# Altium PCB AICat V1.5 双面板 板厚1.6mm.PcbDoc (part 5 of 6)
Units mil, origin at the board's own origin, x right, y up, seen from the top; angles counter-clockwise.
Board outline 2778 x 2104 mil, 2 copper layers (Top Layer, Bottom Layer); 123 components, 84 nets, 332 pads, 256 vias.
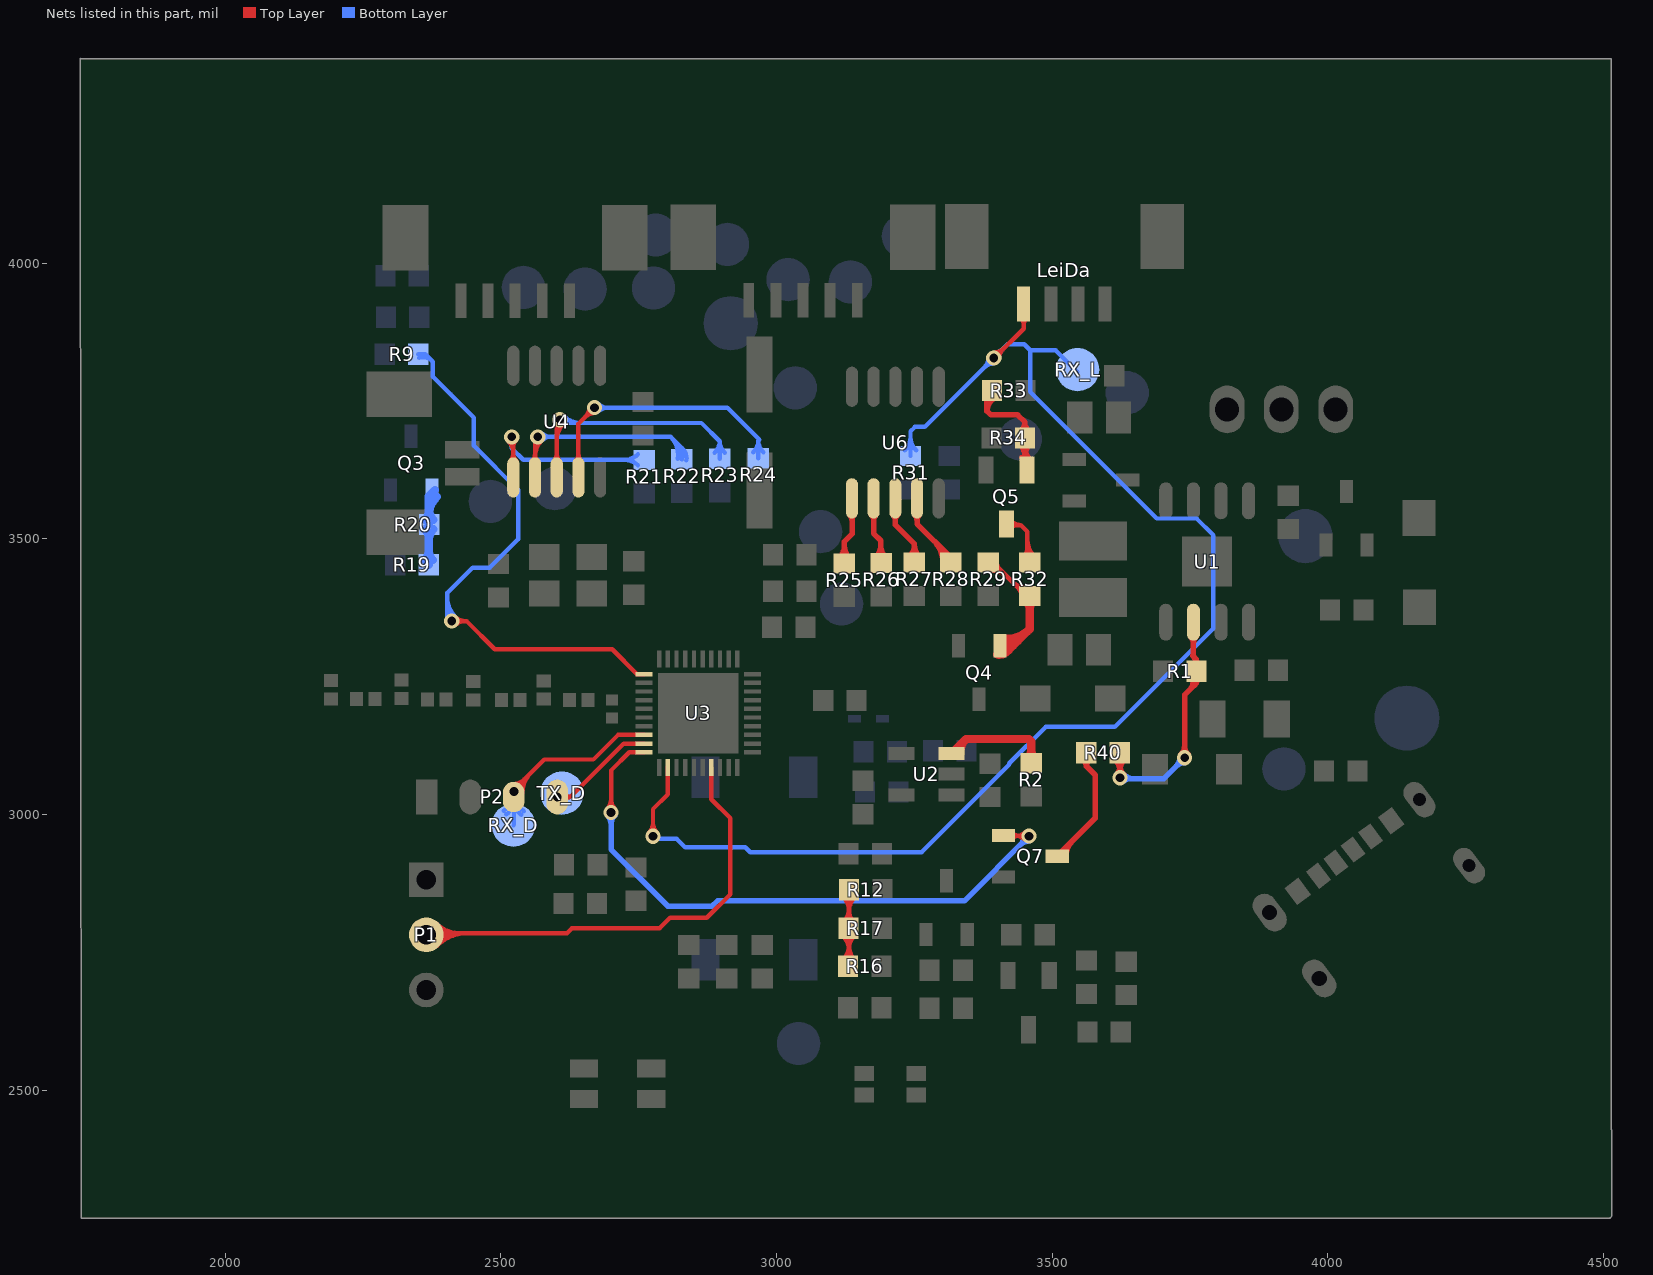
[diagram p5: the nets of this part, all layers, seen from the top]

## Via types
v1: diameter 27.56, hole 15.75, Top Layer to Bottom Layer, tented both sides, 256 vias

## Nets (pads, with @x,y where several pads share a name; then routed paths per layer and width w, separated by ;. In a path a pad name is that pad's centre, name@x,y a point inside that pad or via, vN(x,y) a via of type N, cw(c..) or ccw(c..) an arc to the next point about the centre after c; other vN are vias at no path point) (continued)
NetQ3_1: Q3.1 R19.1 R20.2 | length 935.7
  Bottom Layer w15: R19.1@2369.31,3453 2369.31,3577.09 Q3.1@2380.92,3588.69 ; Q3.1@2377.97,3576.39 ccw(c2398.87,3555.49) 2369.31,3555.49 ; R19.1@2361.67,3461.63 ccw(c2343.22,3480.07) 2369.31,3480.07 ; R19.1@2361.67,3461.63 ccw(c2343.22,3480.07) 2369.31,3480.07 ; R19.1@2361.67,3461.63 ccw(c2343.22,3480.07) 2369.31,3480.07 ; R19.1@2361.67,3461.63 ccw(c2343.22,3480.07) 2369.31,3480.07 ; R19.1@2361.67,3461.63 ccw(c2343.22,3480.07) 2369.31,3480.07 ; R20.2@2362.67,3517.37 cw(c2346.64,3501.34) 2369.31,3501.34 ; R20.2@2362.67,3517.37 cw(c2346.64,3501.34) 2369.31,3501.34 ; R20.2@2362.67,3517.37 cw(c2346.64,3501.34) 2369.31,3501.34 ; R20.2@2362.67,3517.37 cw(c2346.64,3501.34) 2369.31,3501.34 ; R20.2@2362.67,3517.37 cw(c2346.64,3501.34) 2369.31,3501.34 ; R20.2@2362.67,3534.63 ccw(c2346.64,3550.66) 2369.31,3550.66 ; R20.2@2362.67,3534.63 ccw(c2346.64,3550.66) 2369.31,3550.66 ; R20.2@2362.67,3534.63 ccw(c2346.64,3550.66) 2369.31,3550.66 ; R20.2@2362.67,3534.63 ccw(c2346.64,3550.66) 2369.31,3550.66 ; R20.2@2362.67,3534.63 ccw(c2346.64,3550.66) 2369.31,3550.66 ; 2369.31,3480.07 ccw(c2395.4,3480.07) R19.1@2376.96,3461.63 ; 2369.31,3480.07 ccw(c2395.4,3480.07) R19.1@2376.96,3461.63 ; 2369.31,3480.07 ccw(c2395.4,3480.07) R19.1@2376.96,3461.63 ; 2369.31,3480.07 ccw(c2395.4,3480.07) R19.1@2376.96,3461.63 ; 2369.31,3480.07 ccw(c2395.4,3480.07) R19.1@2376.96,3461.63 ; 2369.31,3496.51 cw(c2398.83,3496.51) R20.2@2377.96,3517.37 ; 2369.31,3496.51 cw(c2398.83,3496.51) R20.2@2377.96,3517.37 ; 2369.31,3496.51 cw(c2398.83,3496.51) R20.2@2377.96,3517.37 ; 2369.31,3496.51 cw(c2398.83,3496.51) R20.2@2377.96,3517.37 ; 2369.31,3496.51 cw(c2398.83,3496.51) R20.2@2377.96,3517.37 ; R20.2@2369.31,3541.01 cw(c2419.35,3541.01) Q3.1@2383.97,3576.39 ; R20.2@2369.31,3541.01 cw(c2419.35,3541.01) Q3.1@2383.97,3576.39 ; R20.2@2369.31,3541.01 cw(c2419.35,3541.01) Q3.1@2383.97,3576.39 ; R20.2@2369.31,3541.01 cw(c2419.35,3541.01) Q3.1@2383.97,3576.39 ; 2369.31,3555.49 ccw(c2398.83,3555.49) R20.2@2377.96,3534.63 ; 2369.31,3555.49 ccw(c2398.83,3555.49) R20.2@2377.96,3534.63 ; 2369.31,3555.49 ccw(c2398.83,3555.49) R20.2@2377.96,3534.63 ; 2369.31,3555.49 ccw(c2398.83,3555.49) R20.2@2377.96,3534.63 ; 2369.31,3555.49 ccw(c2398.83,3555.49) R20.2@2377.96,3534.63
NetQ4_1: Q4.1 R29.2 R32.1 | length 1813.3
  Top Layer w8: R29.2@3378,3458.32 3391.37,3458.32 R32.1@3453,3396.69 ; R29.2@3384.98,3443.01 cw(c3384.98,3390.64) 3422.02,3427.67 ; R29.2@3384.98,3443.01 cw(c3384.98,3390.64) 3422.02,3427.67 ; R29.2@3384.98,3443.01 cw(c3384.98,3390.64) 3422.02,3427.67 ; R29.2@3384.98,3443.01 cw(c3384.98,3390.64) 3422.02,3427.67 ; R29.2@3384.98,3443.01 cw(c3384.98,3390.64) 3422.02,3427.67 ; R29.2@3384.98,3451.01 cw(c3384.98,3417.95) 3408.36,3441.33 ; R29.2@3384.98,3451.01 cw(c3384.98,3417.95) 3408.36,3441.33 ; R29.2@3384.98,3451.01 cw(c3384.98,3417.95) 3408.36,3441.33 ; R29.2@3384.98,3451.01 cw(c3384.98,3417.95) 3408.36,3441.33 ; R29.2@3384.98,3451.01 cw(c3384.98,3417.95) 3408.36,3441.33 ; R29.2@3399.29,3457.32 ccw(c3416,3457.32) 3404.19,3445.5 ; R29.2@3399.29,3457.32 ccw(c3416,3457.32) 3404.19,3445.5 ; R29.2@3399.29,3457.32 ccw(c3416,3457.32) 3404.19,3445.5 ; R29.2@3399.29,3457.32 ccw(c3416,3457.32) 3404.19,3445.5 ; R29.2@3399.29,3457.32 ccw(c3416,3457.32) 3404.19,3445.5 ; 3425.03,3424.66 ccw(c3458.02,3457.64) R32.1@3458.02,3410.99 ; 3425.03,3424.66 ccw(c3458.02,3457.64) R32.1@3458.02,3410.99 ; 3425.03,3424.66 ccw(c3458.02,3457.64) R32.1@3458.02,3410.99 ; 3425.03,3424.66 ccw(c3458.02,3457.64) R32.1@3458.02,3410.99 ; 3425.03,3424.66 ccw(c3458.02,3457.64) R32.1@3458.02,3410.99 ; 3437.14,3412.55 cw(c3421.28,3396.69) R32.1@3443.71,3396.69 ; 3437.14,3412.55 cw(c3421.28,3396.69) R32.1@3443.71,3396.69 ; 3437.14,3412.55 cw(c3421.28,3396.69) R32.1@3443.71,3396.69 ; 3437.14,3412.55 cw(c3421.28,3396.69) R32.1@3443.71,3396.69 ; 3437.14,3412.55 cw(c3421.28,3396.69) R32.1@3443.71,3396.69 ; 3438.69,3411 ccw(c3458.02,3430.33) R32.1@3458.02,3402.99 ; 3438.69,3411 ccw(c3458.02,3430.33) R32.1@3458.02,3402.99 ; 3438.69,3411 ccw(c3458.02,3430.33) R32.1@3458.02,3402.99 ; 3438.69,3411 ccw(c3458.02,3430.33) R32.1@3458.02,3402.99 ; 3438.69,3411 ccw(c3458.02,3430.33) R32.1@3458.02,3402.99
  Top Layer w15: Q4.1@3404.92,3296.87 ccw(c3404.92,3332.03) 3429.78,3307.17 ; Q4.1@3404.92,3298.31 3420.92,3298.31 3459,3336.39 ; Q4.1@3404.92,3311.87 ccw(c3404.92,3383.24) 3455.39,3332.77 ; R32.1@3459,3396.69 3459,3336.39 ; Q4.1@3400.27,3290.29 ccw(c3404.01,3310.61) 3418.62,3296 ; Q4.1@3400.27,3290.29 ccw(c3404.01,3310.61) 3418.62,3296 ; Q4.1@3400.27,3290.29 ccw(c3404.01,3310.61) 3418.62,3296 ; Q4.1@3400.27,3290.29 ccw(c3404.01,3310.61) 3418.62,3296 ; Q4.1@3402.99,3305.05 ccw(c3410.29,3344.71) 3438.81,3316.19 ; Q4.1@3402.99,3305.05 ccw(c3410.29,3344.71) 3438.81,3316.19 ; Q4.1@3402.99,3305.05 ccw(c3410.29,3344.71) 3438.81,3316.19 ; Q4.1@3402.99,3305.05 ccw(c3410.29,3344.71) 3438.81,3316.19 ; Q4.1@3405.7,3319.8 ccw(c3416.57,3378.82) 3459,3336.38 ; Q4.1@3405.7,3319.8 ccw(c3416.57,3378.82) 3459,3336.38 ; Q4.1@3405.7,3319.8 ccw(c3416.57,3378.82) 3459,3336.38 ; Q4.1@3405.7,3319.8 ccw(c3416.57,3378.82) 3459,3336.38 ; Q4.1@3407.97,3294.01 cw(c3418.35,3283.62) 3418.35,3298.31 ; Q4.1@3407.97,3294.01 cw(c3418.35,3283.62) 3418.35,3298.31 ; Q4.1@3407.97,3294.01 cw(c3418.35,3283.62) 3418.35,3298.31 ; Q4.1@3407.97,3294.01 cw(c3418.35,3283.62) 3418.35,3298.31 ; R32.1@3451.36,3389.04 cw(c3432.91,3370.6) 3459,3370.6 ; R32.1@3451.36,3389.04 cw(c3432.91,3370.6) 3459,3370.6 ; R32.1@3451.36,3389.04 cw(c3432.91,3370.6) 3459,3370.6 ; R32.1@3451.36,3389.04 cw(c3432.91,3370.6) 3459,3370.6 ; R32.1@3451.36,3389.04 cw(c3432.91,3370.6) 3459,3370.6 ; 3459,3370.6 cw(c3485.09,3370.6) R32.1@3466.64,3389.04 ; 3459,3370.6 cw(c3485.09,3370.6) R32.1@3466.64,3389.04 ; 3459,3370.6 cw(c3485.09,3370.6) R32.1@3466.64,3389.04 ; 3459,3370.6 cw(c3485.09,3370.6) R32.1@3466.64,3389.04 ; 3459,3370.6 cw(c3485.09,3370.6) R32.1@3466.64,3389.04
NetQ5_1: Q5.1 R33.1 R34.2 | length 990.1
  Top Layer w8: R33.1@3376.69,3769 R33.1@3376.69,3777 ; Q5.1@3443.31,3648.3 Q5.1@3452.4,3639.21
  Top Layer w10: R33.1@3381.69,3769 3381.69,3732.31 3389,3725 3437,3725 3450.32,3711.68 ; Q5.1@3450.32,3625.21 3450.32,3711.68 ; 3381.69,3735.89 cw(c3413.81,3735.89) R33.1@3391.1,3758.61 ; 3381.69,3735.89 cw(c3413.81,3735.89) R33.1@3391.1,3758.61 ; 3381.69,3735.89 cw(c3413.81,3735.89) R33.1@3391.1,3758.61 ; R34.2@3440.91,3672.61 cw(c3418.19,3649.89) 3450.32,3649.89 ; R34.2@3440.91,3672.61 cw(c3418.19,3649.89) 3450.32,3649.89 ; R34.2@3440.91,3672.61 cw(c3418.19,3649.89) 3450.32,3649.89 ; R34.2@3440.91,3672.61 cw(c3418.19,3649.89) 3450.32,3649.89 ; R34.2@3440.91,3672.61 cw(c3418.19,3649.89) 3450.32,3649.89 ; R34.2@3442,3694.37 ccw(c3428.14,3711.68) 3450.32,3711.68 ; R34.2@3442,3694.37 ccw(c3428.14,3711.68) 3450.32,3711.68 ; R34.2@3442,3694.37 ccw(c3428.14,3711.68) 3450.32,3711.68 ; R34.2@3442,3694.37 ccw(c3428.14,3711.68) 3450.32,3711.68 ; R34.2@3442,3694.37 ccw(c3428.14,3711.68) 3450.32,3711.68 ; 3450.32,3649.89 cw(c3482.44,3649.89) R34.2@3459.73,3672.61 ; 3450.32,3649.89 cw(c3482.44,3649.89) R34.2@3459.73,3672.61 ; 3450.32,3649.89 cw(c3482.44,3649.89) R34.2@3459.73,3672.61 ; 3450.32,3649.89 cw(c3482.44,3649.89) R34.2@3459.73,3672.61 ; 3450.32,3649.89 cw(c3482.44,3649.89) R34.2@3459.73,3672.61 ; R34.2@3450.32,3667.1 ccw(c3485.46,3667.1) Q5.1@3460.61,3642.25 ; R34.2@3450.32,3667.1 ccw(c3485.46,3667.1) Q5.1@3460.61,3642.25 ; R34.2@3450.32,3667.1 ccw(c3485.46,3667.1) Q5.1@3460.61,3642.25 ; R34.2@3450.32,3667.1 ccw(c3485.46,3667.1) Q5.1@3460.61,3642.25 ; R34.2@3450.32,3667.1 ccw(c3485.46,3667.1) Q5.1@3460.61,3642.25 ; 3450.32,3711.68 ccw(c3472.49,3711.68) R34.2@3458.63,3694.37 ; 3450.32,3711.68 ccw(c3472.49,3711.68) R34.2@3458.63,3694.37 ; 3450.32,3711.68 ccw(c3472.49,3711.68) R34.2@3458.63,3694.37 ; 3450.32,3711.68 ccw(c3472.49,3711.68) R34.2@3458.63,3694.37 ; 3450.32,3711.68 ccw(c3472.49,3711.68) R34.2@3458.63,3694.37 ; 3381.69,3731.2 cw(c3409.92,3731.2) 3396.85,3756.22 ccw(c3409.92,3731.2) 3381.69,3731.2 ; 3381.69,3747.7 cw(c3401.3,3747.7) 3392.22,3765.08 ccw(c3401.3,3747.7) 3381.69,3747.7
NetQ5_3: Q5.3 R32.2 | length 619.5
  Top Layer w8: Q5.3@3408,3525 3443,3525 ; R32.2@3453,3457.32 3455,3459.32 3455,3513 3443,3525 ; Q5.3@3423.92,3519.87 cw(c3436.29,3507.49) 3436.29,3525 ; Q5.3@3423.92,3519.87 cw(c3436.29,3507.49) 3436.29,3525 ; Q5.3@3423.92,3519.87 cw(c3436.29,3507.49) 3436.29,3525 ; Q5.3@3423.92,3519.87 cw(c3436.29,3507.49) 3436.29,3525 ; Q5.3@3424.26,3533.34 ccw(c3443,3550.22) 3443,3525 ; Q5.3@3424.26,3533.34 ccw(c3443,3550.22) 3443,3525 ; Q5.3@3424.26,3533.34 ccw(c3443,3550.22) 3443,3525 ; Q5.3@3424.26,3533.34 ccw(c3443,3550.22) 3443,3525 ; R32.2@3447.9,3467.43 ccw(c3430.76,3484.58) 3455,3484.58 ; R32.2@3447.9,3467.43 ccw(c3430.76,3484.58) 3455,3484.58 ; R32.2@3447.9,3467.43 ccw(c3430.76,3484.58) 3455,3484.58 ; R32.2@3447.9,3467.43 ccw(c3430.76,3484.58) 3455,3484.58 ; R32.2@3447.9,3467.43 ccw(c3430.76,3484.58) 3455,3484.58 ; 3455,3479.82 ccw(c3480.52,3479.82) R32.2@3462.48,3461.78 ; 3455,3479.82 ccw(c3480.52,3479.82) R32.2@3462.48,3461.78 ; 3455,3479.82 ccw(c3480.52,3479.82) R32.2@3462.48,3461.78 ; 3455,3479.82 ccw(c3480.52,3479.82) R32.2@3462.48,3461.78 ; 3455,3479.82 ccw(c3480.52,3479.82) R32.2@3462.48,3461.78 ; 3455,3499.14 ccw(c3499.84,3499.14) R32.2@3468.13,3467.43 ; 3455,3499.14 ccw(c3499.84,3499.14) R32.2@3468.13,3467.43 ; 3455,3499.14 ccw(c3499.84,3499.14) R32.2@3468.13,3467.43 ; 3455,3499.14 ccw(c3499.84,3499.14) R32.2@3468.13,3467.43 ; 3455,3499.14 ccw(c3499.84,3499.14) R32.2@3468.13,3467.43
NetQ7_3: Q7.3 R40.1 | length 480.9
  Top Layer w10: Q7.3@3508.94,2924.52 3578,2993.58 3578,3071.69 3561.69,3088 ; R40.1@3561.69,3112 3561.69,3088 ; Q7.3@3525,2924.52 cw(c3563.78,2924.52) 3536.36,2951.94 ; Q7.3@3525,2924.52 cw(c3563.78,2924.52) 3536.36,2951.94 ; Q7.3@3525,2924.52 cw(c3563.78,2924.52) 3536.36,2951.94 ; R40.1@3555.05,3099.48 cw(c3548.44,3088) 3561.69,3088 ; R40.1@3555.05,3099.48 cw(c3548.44,3088) 3561.69,3088 ; R40.1@3555.05,3099.48 cw(c3548.44,3088) 3561.69,3088 ; R40.1@3555.05,3099.48 cw(c3548.44,3088) 3561.69,3088 ; R40.1@3555.05,3099.48 cw(c3548.44,3088) 3561.69,3088 ; R40.1@3555.05,3099.48 cw(c3548.44,3088) 3561.69,3088 ; 3561.69,3088 cw(c3574.93,3088) R40.1@3568.32,3099.48 ; 3561.69,3088 cw(c3574.93,3088) R40.1@3568.32,3099.48 ; 3561.69,3088 cw(c3574.93,3088) R40.1@3568.32,3099.48 ; 3561.69,3088 cw(c3574.93,3088) R40.1@3568.32,3099.48 ; 3561.69,3088 cw(c3574.93,3088) R40.1@3568.32,3099.48 ; 3561.69,3088 cw(c3574.93,3088) R40.1@3568.32,3099.48
NetR1_2: R1.2 R40.2 U1.2 | length 1638.9
  Top Layer w10: R40.2@3611.68,3101.32 3623,3090 ; v1(3623,3067) 3623,3090 ; v1(3740,3103) 3740,3217 3761.32,3238.32 ; U1.2@3756,3372 U1.2@3756,3349 3756,3287 3761,3282 ; R1.2@3761.32,3260 3761.32,3238.32 ; R40.2@3612.91,3101.61 cw(c3588.54,3077.24) v1@3623,3077.24 ; R40.2@3612.91,3101.61 cw(c3588.54,3077.24) v1@3623,3077.24 ; R40.2@3612.91,3101.61 cw(c3588.54,3077.24) v1@3623,3077.24 ; v1@3616.79,3073.21 ccw(c3601.8,3088.2) 3623,3088.2 ; v1@3616.79,3073.21 ccw(c3601.8,3088.2) 3623,3088.2 ; v1@3616.79,3073.21 ccw(c3601.8,3088.2) 3623,3088.2 ; R40.2@3617.18,3098.74 cw(c3613.51,3089.99) 3623,3089.99 ; R40.2@3617.18,3098.74 cw(c3613.51,3089.99) 3623,3089.99 ; R40.2@3617.18,3098.74 cw(c3613.51,3089.99) 3623,3089.99 ; v1@3623,3080.54 cw(c3652.79,3080.54) R40.2@3631.73,3101.61 ; v1@3623,3080.54 cw(c3652.79,3080.54) R40.2@3631.73,3101.61 ; v1@3623,3080.54 cw(c3652.79,3080.54) R40.2@3631.73,3101.61 ; 3623,3088.2 ccw(c3644.2,3088.2) v1@3629.21,3073.21 ; 3623,3088.2 ccw(c3644.2,3088.2) v1@3629.21,3073.21 ; 3623,3088.2 ccw(c3644.2,3088.2) v1@3629.21,3073.21 ; 3623,3089.99 cw(c3633.52,3089.99) R40.2@3628.57,3099.27 ; 3623,3089.99 cw(c3633.52,3089.99) R40.2@3628.57,3099.27 ; 3623,3089.99 cw(c3633.52,3089.99) R40.2@3628.57,3099.27 ; v1@3733.79,3109.21 ccw(c3718.8,3124.2) 3740,3124.2 ; v1@3733.79,3109.21 ccw(c3718.8,3124.2) 3740,3124.2 ; v1@3733.79,3109.21 ccw(c3718.8,3124.2) 3740,3124.2 ; 3740,3124.2 ccw(c3761.2,3124.2) v1@3746.21,3109.21 ; 3740,3124.2 ccw(c3761.2,3124.2) v1@3746.21,3109.21 ; 3740,3124.2 ccw(c3761.2,3124.2) v1@3746.21,3109.21 ; 3750.35,3227.35 ccw(c3738.38,3239.32) R1.2@3751.22,3250.35 ; 3750.35,3227.35 ccw(c3738.38,3239.32) R1.2@3751.22,3250.35 ; 3750.35,3227.35 ccw(c3738.38,3239.32) R1.2@3751.22,3250.35 ; U1.2@3751.05,3322.59 cw(c3739.1,3310.64) 3756,3310.64 ; U1.2@3751.05,3322.59 cw(c3739.1,3310.64) 3756,3310.64 ; U1.2@3751.05,3322.59 cw(c3739.1,3310.64) 3756,3310.64 ; U1.2@3751.05,3322.59 cw(c3739.1,3310.64) 3756,3310.64 ; U1.2@3751.05,3322.59 cw(c3739.1,3310.64) 3756,3310.64 ; 3754.96,3288.04 cw(c3739.96,3273.04) R1.2@3758.44,3262.61 ; 3754.96,3288.04 cw(c3739.96,3273.04) R1.2@3758.44,3262.61 ; 3754.96,3288.04 cw(c3739.96,3273.04) R1.2@3758.44,3262.61 ; 3754.96,3288.04 cw(c3739.96,3273.04) R1.2@3758.44,3262.61 ; 3754.96,3288.04 cw(c3739.96,3273.04) R1.2@3758.44,3262.61 ; R1.2@3755.79,3246.91 cw(c3751.87,3238.32) 3761.32,3238.32 ; R1.2@3755.79,3246.91 cw(c3751.87,3238.32) 3761.32,3238.32 ; R1.2@3755.79,3246.91 cw(c3751.87,3238.32) 3761.32,3238.32 ; 3756,3310.64 cw(c3772.9,3310.64) U1.2@3760.95,3322.59 ; 3756,3310.64 cw(c3772.9,3310.64) U1.2@3760.95,3322.59 ; 3756,3310.64 cw(c3772.9,3310.64) U1.2@3760.95,3322.59 ; 3756,3310.64 cw(c3772.9,3310.64) U1.2@3760.95,3322.59 ; 3756,3310.64 cw(c3772.9,3310.64) U1.2@3760.95,3322.59 ; 3757.98,3234.98 ccw(c3746.59,3246.37) R1.2@3758.81,3256.86 ; 3757.98,3234.98 ccw(c3746.59,3246.37) R1.2@3758.81,3256.86 ; 3757.98,3234.98 ccw(c3746.59,3246.37) R1.2@3758.81,3256.86 ; 3758.17,3284.83 cw(c3746.99,3273.65) R1.2@3758.84,3263.17 ; 3758.17,3284.83 cw(c3746.99,3273.65) R1.2@3758.84,3263.17 ; 3758.17,3284.83 cw(c3746.99,3273.65) R1.2@3758.84,3263.17 ; 3758.17,3284.83 cw(c3746.99,3273.65) R1.2@3758.84,3263.17 ; 3758.17,3284.83 cw(c3746.99,3273.65) R1.2@3758.84,3263.17 ; 3761.32,3238.32 cw(c3770.76,3238.32) R1.2@3766.84,3246.91 ; 3761.32,3238.32 cw(c3770.76,3238.32) R1.2@3766.84,3246.91 ; 3761.32,3238.32 cw(c3770.76,3238.32) R1.2@3766.84,3246.91
  Bottom Layer w10: v1@3635,3065 3702,3065 v1(3740,3103) ; v1@3629.21,3060.79 cw(c3639.37,3050.63) 3639.37,3065 ; v1@3629.21,3060.79 cw(c3639.37,3050.63) 3639.37,3065 ; v1@3629.21,3060.79 cw(c3639.37,3050.63) 3639.37,3065 ; v1@3629.21,3073.21 ccw(c3649.02,3093.02) 3649.02,3065 ; v1@3629.21,3073.21 ccw(c3649.02,3093.02) 3649.02,3065 ; v1@3629.21,3073.21 ccw(c3649.02,3093.02) 3649.02,3065 ; 3725.01,3088.01 cw(c3740,3073.02) v1@3740,3094.22 ; 3725.01,3088.01 ccw(c3710.02,3103) v1@3731.22,3103 ; 3725.01,3088.01 cw(c3740,3073.02) v1@3740,3094.22 ; 3725.01,3088.01 ccw(c3710.02,3103) v1@3731.22,3103 ; 3725.01,3088.01 ccw(c3710.02,3103) v1@3731.22,3103 ; 3725.01,3088.01 cw(c3740,3073.02) v1@3740,3094.22
NetR2_2: R2.2 U2.3 | length 546
  Top Layer w15: U2.3@3317.17,3110.73 3343.44,3137 ; R2.2@3462,3093.32 3462,3133 3458,3137 3343.44,3137 ; U2.3@3333.29,3110.92 cw(c3368.03,3112.41) 3343.44,3137 ; U2.3@3333.29,3110.92 cw(c3368.03,3112.41) 3343.44,3137 ; U2.3@3333.29,3110.92 cw(c3368.03,3112.41) 3343.44,3137 ; U2.3@3333.29,3110.92 cw(c3368.03,3112.41) 3343.44,3137 ; U2.3@3333.29,3110.92 cw(c3368.03,3112.41) 3343.44,3137 ; R2.2@3454.36,3100.96 ccw(c3435.91,3119.41) 3462,3119.41 ; R2.2@3454.36,3100.96 ccw(c3435.91,3119.41) 3462,3119.41 ; R2.2@3454.36,3100.96 ccw(c3435.91,3119.41) 3462,3119.41 ; R2.2@3454.36,3100.96 ccw(c3435.91,3119.41) 3462,3119.41 ; R2.2@3454.36,3100.96 ccw(c3435.91,3119.41) 3462,3119.41 ; 3462,3119.41 ccw(c3488.09,3119.41) R2.2@3469.64,3100.96 ; 3462,3119.41 ccw(c3488.09,3119.41) R2.2@3469.64,3100.96 ; 3462,3119.41 ccw(c3488.09,3119.41) R2.2@3469.64,3100.96 ; 3462,3119.41 ccw(c3488.09,3119.41) R2.2@3469.64,3100.96 ; 3462,3119.41 ccw(c3488.09,3119.41) R2.2@3469.64,3100.96
NetR12_2: R12.2 R16.2 R17.1 | length 1311.6
  Top Layer w8: R16.2@3123.57,2733.1 ccw(c3103.97,2752.7) 3131.68,2752.7 ; R12.2@3131.68,2861 3131.68,2724 R16.2@3133.68,2722 ; R16.2@3138.14,2727.44 cw(c3153.74,2743.04) R16.2@3131.68,2743.04 ; R16.2@3143.8,2733.1 cw(c3173.05,2762.35) 3131.68,2762.35 ; R17.1@3120.57,2779.9 cw(c3093.74,2753.07) 3131.68,2753.07 ; R17.1@3120.57,2779.9 cw(c3093.74,2753.07) 3131.68,2753.07 ; R17.1@3120.57,2779.9 cw(c3093.74,2753.07) 3131.68,2753.07 ; R17.1@3120.57,2802.1 ccw(c3093.74,2828.93) 3131.68,2828.93 ; R17.1@3120.57,2802.1 ccw(c3093.74,2828.93) 3131.68,2828.93 ; R17.1@3120.57,2802.1 ccw(c3093.74,2828.93) 3131.68,2828.93 ; R12.2@3121.57,2849.9 cw(c3097.14,2825.48) 3131.68,2825.48 ; R12.2@3121.57,2849.9 cw(c3097.14,2825.48) 3131.68,2825.48 ; R12.2@3121.57,2849.9 cw(c3097.14,2825.48) 3131.68,2825.48 ; R16.2@3131.68,2743.04 cw(c3109.63,2743.04) 3125.22,2727.44 ccw(c3109.63,2743.04) R16.2@3131.68,2743.04 ; 3131.68,2752.7 ccw(c3159.4,2752.7) 3139.8,2733.1 cw(c3159.4,2752.7) 3131.68,2752.7 ; 3131.68,2757.88 cw(c3162.82,2757.88) R17.1@3140.8,2779.9 ; 3131.68,2757.88 cw(c3162.82,2757.88) R17.1@3140.8,2779.9 ; 3131.68,2757.88 cw(c3162.82,2757.88) R17.1@3140.8,2779.9 ; 3131.68,2762.35 cw(c3090.32,2762.35) 3119.57,2733.1 ccw(c3090.32,2762.35) 3131.68,2762.35 ; 3131.68,2824.12 ccw(c3162.82,2824.12) R17.1@3140.8,2802.1 ; 3131.68,2824.12 ccw(c3162.82,2824.12) R17.1@3140.8,2802.1 ; 3131.68,2824.12 ccw(c3162.82,2824.12) R17.1@3140.8,2802.1 ; 3131.68,2825.48 cw(c3166.22,2825.48) R12.2@3141.8,2849.9 ; 3131.68,2825.48 cw(c3166.22,2825.48) R12.2@3141.8,2849.9 ; 3131.68,2825.48 cw(c3166.22,2825.48) R12.2@3141.8,2849.9 ; 3131.68,2827.48 cw(c3166.22,2827.48) 3141.8,2851.9 ccw(c3166.22,2827.48) 3131.68,2827.48 ; 3131.68,2827.48 ccw(c3097.14,2827.48) 3121.57,2851.9 cw(c3097.14,2827.48) 3131.68,2827.48 ; R16.2@3119.57,2735.1 ccw(c3090.32,2764.35) 3131.68,2764.35 cw(c3090.32,2764.35) R16.2@3119.57,2735.1 ; R17.1@3120.57,2781.9 cw(c3093.74,2755.07) 3131.68,2755.07 ccw(c3093.74,2755.07) R17.1@3120.57,2781.9 ; R17.1@3120.57,2804.1 ccw(c3093.74,2830.93) 3131.68,2830.93 cw(c3093.74,2830.93) R17.1@3120.57,2804.1 ; R16.2@3125.22,2729.44 ccw(c3109.63,2745.04) 3131.68,2745.04 cw(c3109.63,2745.04) R16.2@3125.22,2729.44 ; 3131.68,2754.7 ccw(c3159.4,2754.7) 3139.8,2735.1 cw(c3159.4,2754.7) 3131.68,2754.7 ; 3131.68,2759.88 cw(c3162.82,2759.88) 3140.8,2781.9 ccw(c3162.82,2759.88) 3131.68,2759.88 ; 3131.68,2826.12 ccw(c3162.82,2826.12) 3140.8,2804.1 cw(c3162.82,2826.12) 3131.68,2826.12
NetR21_1: R21.1 U4.1 | length 1025.7
  Top Layer w8: v1(2520,3685) 2522.72,3682.28 U4.1@2522.72,3611.52 ; v1@2513.08,3678.08 cw(c2489.83,3654.83) 2522.72,3654.83 ; v1@2513.08,3678.08 cw(c2489.83,3654.83) 2522.72,3654.83 ; v1@2513.08,3678.08 cw(c2489.83,3654.83) 2522.72,3654.83 ; v1@2513.08,3678.08 cw(c2489.83,3654.83) 2522.72,3654.83 ; v1@2513.08,3678.08 cw(c2489.83,3654.83) 2522.72,3654.83 ; U4.1@2517.75,3641.97 ccw(c2505.76,3653.96) 2522.72,3653.96 ; U4.1@2517.75,3641.97 ccw(c2505.76,3653.96) 2522.72,3653.96 ; U4.1@2517.75,3641.97 ccw(c2505.76,3653.96) 2522.72,3653.96 ; U4.1@2517.75,3641.97 ccw(c2505.76,3653.96) 2522.72,3653.96 ; U4.1@2517.75,3641.97 ccw(c2505.76,3653.96) 2522.72,3653.96 ; 2522.72,3653.96 ccw(c2539.67,3653.96) U4.1@2527.68,3641.97 ; 2522.72,3653.96 ccw(c2539.67,3653.96) U4.1@2527.68,3641.97 ; 2522.72,3653.96 ccw(c2539.67,3653.96) U4.1@2527.68,3641.97 ; 2522.72,3653.96 ccw(c2539.67,3653.96) U4.1@2527.68,3641.97 ; 2522.72,3653.96 ccw(c2539.67,3653.96) U4.1@2527.68,3641.97 ; 2522.72,3667.95 cw(c2537.05,3667.95) v1@2526.92,3678.08 ; 2522.72,3667.95 cw(c2537.05,3667.95) v1@2526.92,3678.08 ; 2522.72,3667.95 cw(c2537.05,3667.95) v1@2526.92,3678.08 ; 2522.72,3667.95 cw(c2537.05,3667.95) v1@2526.92,3678.08 ; 2522.72,3667.95 cw(c2537.05,3667.95) v1@2526.92,3678.08
  Bottom Layer w8: v1(2520,3685) 2520,3664 ; 2710,3643.31 2696,3643.31 ; 2737,3641 2734.69,3643.31 2696,3643.31 ; v1@2513.71,3677.51 cw(c2502.34,3664) 2520,3664 ; v1@2513.71,3677.51 cw(c2502.34,3664) 2520,3664 ; v1@2513.71,3677.51 cw(c2502.34,3664) 2520,3664 ; v1@2513.71,3677.51 cw(c2502.34,3664) 2520,3664 ; v1@2513.71,3677.51 cw(c2502.34,3664) 2520,3664 ; 2520,3664 cw(c2537.66,3664) v1@2526.29,3677.51 ; 2520,3664 cw(c2537.66,3664) v1@2526.29,3677.51 ; 2520,3664 cw(c2537.66,3664) v1@2526.29,3677.51 ; 2520,3664 cw(c2537.66,3664) v1@2526.29,3677.51 ; 2520,3664 cw(c2537.66,3664) v1@2526.29,3677.51 ; 2520,3664 2540.69,3643.31 2696,3643.31 ; 2724.48,3643.31 cw(c2724.48,3608.77) R21.1@2748.9,3633.2 ; 2724.48,3643.31 ccw(c2724.48,3677.85) R21.1@2748.9,3653.43 ; 2724.48,3643.31 cw(c2724.48,3608.77) R21.1@2748.9,3633.2 ; 2724.48,3643.31 ccw(c2724.48,3677.85) R21.1@2748.9,3653.43 ; 2724.48,3643.31 ccw(c2724.48,3677.85) R21.1@2748.9,3653.43 ; 2724.48,3643.31 cw(c2724.48,3608.77) R21.1@2748.9,3633.2 ; 2724.48,3643.31 ccw(c2724.48,3677.85) R21.1@2748.9,3653.43 ; 2724.48,3643.31 cw(c2724.48,3608.77) R21.1@2748.9,3633.2
NetR22_1: R22.1 U4.2 | length 1413.2
  Top Layer w8: U4.2@2562.09,3611.52 2562.09,3680.09 v1(2567,3685) ; U4.2@2557.12,3641.97 ccw(c2545.13,3653.96) 2562.09,3653.96 ; U4.2@2557.12,3641.97 ccw(c2545.13,3653.96) 2562.09,3653.96 ; U4.2@2557.12,3641.97 ccw(c2545.13,3653.96) 2562.09,3653.96 ; U4.2@2557.12,3641.97 ccw(c2545.13,3653.96) 2562.09,3653.96 ; U4.2@2557.12,3641.97 ccw(c2545.13,3653.96) 2562.09,3653.96 ; 2562.09,3649.53 cw(c2602.47,3649.53) v1@2573.92,3678.08 ; 2562.09,3649.53 cw(c2602.47,3649.53) v1@2573.92,3678.08 ; 2562.09,3649.53 cw(c2602.47,3649.53) v1@2573.92,3678.08 ; 2562.09,3649.53 cw(c2602.47,3649.53) v1@2573.92,3678.08 ; 2562.09,3649.53 cw(c2602.47,3649.53) v1@2573.92,3678.08 ; 2562.09,3653.96 ccw(c2579.04,3653.96) U4.2@2567.05,3641.97 ; 2562.09,3653.96 ccw(c2579.04,3653.96) U4.2@2567.05,3641.97 ; 2562.09,3653.96 ccw(c2579.04,3653.96) U4.2@2567.05,3641.97 ; 2562.09,3653.96 ccw(c2579.04,3653.96) U4.2@2567.05,3641.97 ; 2562.09,3653.96 ccw(c2579.04,3653.96) U4.2@2567.05,3641.97 ; 2562.09,3668.84 cw(c2583.16,3668.84) v1@2568.26,3683.74 ; 2562.09,3668.84 cw(c2583.16,3668.84) v1@2568.26,3683.74 ; 2562.09,3668.84 cw(c2583.16,3668.84) v1@2568.26,3683.74 ; 2562.09,3668.84 cw(c2583.16,3668.84) v1@2568.26,3683.74 ; 2562.09,3668.84 cw(c2583.16,3668.84) v1@2568.26,3683.74
  Bottom Layer w8: v1(2567,3685) 2808,3685 2808.15,3684.85 ; 2808.26,3684.74 cw(c2776.45,3652.93) R22.1@2820.8,3645.37 ; 2819.21,3673.79 cw(c2795.15,3649.74) R22.1@2828.68,3644.03 ; R22.1@2828,3644.31 2828,3665 2808.15,3684.85 ; 2830.15,3662.85 cw(c2813.85,3646.56) R22.1@2836.57,3642.69 ; v1@2573.92,3678.08 cw(c2590.61,3661.39) 2590.61,3685 ; v1@2573.92,3678.08 cw(c2590.61,3661.39) 2590.61,3685 ; v1@2573.92,3678.08 cw(c2590.61,3661.39) 2590.61,3685 ; v1@2573.92,3678.08 cw(c2590.61,3661.39) 2590.61,3685 ; v1@2573.92,3678.08 cw(c2590.61,3661.39) 2590.61,3685 ; v1@2573.92,3691.92 ccw(c2590.61,3708.61) 2590.61,3685 ; v1@2573.92,3691.92 ccw(c2590.61,3708.61) 2590.61,3685 ; v1@2573.92,3691.92 ccw(c2590.61,3708.61) 2590.61,3685 ; v1@2573.92,3691.92 ccw(c2590.61,3708.61) 2590.61,3685 ; v1@2573.92,3691.92 ccw(c2590.61,3708.61) 2590.61,3685 ; 2808.15,3684.85 cw(c2776.13,3652.83) R22.1@2820.8,3645.35 ; 2808.15,3684.85 cw(c2776.13,3652.83) R22.1@2820.8,3645.35 ; 2808.15,3684.85 cw(c2776.13,3652.83) R22.1@2820.8,3645.35 ; 2808.15,3684.85 cw(c2776.13,3652.83) R22.1@2820.8,3645.35 ; 2819.14,3673.86 cw(c2794.95,3649.68) R22.1@2828.69,3644.03 ; 2819.14,3673.86 cw(c2794.95,3649.68) R22.1@2828.69,3644.03 ; 2819.14,3673.86 cw(c2794.95,3649.68) R22.1@2828.69,3644.03 ; 2819.14,3673.86 cw(c2794.95,3649.68) R22.1@2828.69,3644.03 ; 2830.12,3662.88 cw(c2813.77,3646.53) R22.1@2836.58,3642.71 ; 2830.12,3662.88 cw(c2813.77,3646.53) R22.1@2836.58,3642.71 ; 2830.12,3662.88 cw(c2813.77,3646.53) R22.1@2836.58,3642.71 ; 2830.12,3662.88 cw(c2813.77,3646.53) R22.1@2836.58,3642.71
NetR23_1: R23.1 U4.3 | length 1333.4
  Top Layer w8: U4.3@2601.46,3611.52 2601.46,3710.46 v1(2607,3716) ; U4.3@2596.49,3641.97 ccw(c2584.5,3653.96) 2601.46,3653.96 ; U4.3@2596.49,3641.97 ccw(c2584.5,3653.96) 2601.46,3653.96 ; U4.3@2596.49,3641.97 ccw(c2584.5,3653.96) 2601.46,3653.96 ; U4.3@2596.49,3641.97 ccw(c2584.5,3653.96) 2601.46,3653.96 ; U4.3@2596.49,3641.97 ccw(c2584.5,3653.96) 2601.46,3653.96 ; 2601.46,3653.96 ccw(c2618.41,3653.96) U4.3@2606.42,3641.97 ; 2601.46,3653.96 ccw(c2618.41,3653.96) U4.3@2606.42,3641.97 ; 2601.46,3653.96 ccw(c2618.41,3653.96) U4.3@2606.42,3641.97 ; 2601.46,3653.96 ccw(c2618.41,3653.96) U4.3@2606.42,3641.97 ; 2601.46,3653.96 ccw(c2618.41,3653.96) U4.3@2606.42,3641.97 ; 2601.46,3679.01 cw(c2643.99,3679.01) v1@2613.92,3709.08 ; 2601.46,3679.01 cw(c2643.99,3679.01) v1@2613.92,3709.08 ; 2601.46,3679.01 cw(c2643.99,3679.01) v1@2613.92,3709.08 ; 2601.46,3679.01 cw(c2643.99,3679.01) v1@2613.92,3709.08 ; 2601.46,3679.01 cw(c2643.99,3679.01) v1@2613.92,3709.08 ; 2601.46,3698.32 cw(c2624.68,3698.32) v1@2608.26,3714.74 ; 2601.46,3698.32 cw(c2624.68,3698.32) v1@2608.26,3714.74 ; 2601.46,3698.32 cw(c2624.68,3698.32) v1@2608.26,3714.74 ; 2601.46,3698.32 cw(c2624.68,3698.32) v1@2608.26,3714.74 ; 2601.46,3698.32 cw(c2624.68,3698.32) v1@2608.26,3714.74
  Bottom Layer w8: v1@2608.78,3710.22 2813.78,3710.22 2863.78,3710.22 2897,3677 ; R23.1@2897,3645.31 2897,3677 ; v1@2608.26,3717.26 ccw(c2625.25,3734.25) 2625.25,3710.22 ; v1@2608.26,3717.26 ccw(c2625.25,3734.25) 2625.25,3710.22 ; v1@2608.26,3717.26 ccw(c2625.25,3734.25) 2625.25,3710.22 ; v1@2608.26,3717.26 ccw(c2625.25,3734.25) 2625.25,3710.22 ; v1@2608.26,3717.26 ccw(c2625.25,3734.25) 2625.25,3710.22 ; v1@2613.92,3722.92 ccw(c2644.56,3753.56) 2644.56,3710.22 ; v1@2613.92,3722.92 ccw(c2644.56,3753.56) 2644.56,3710.22 ; v1@2613.92,3722.92 ccw(c2644.56,3753.56) 2644.56,3710.22 ; v1@2613.92,3722.92 ccw(c2644.56,3753.56) 2644.56,3710.22 ; v1@2613.92,3722.92 ccw(c2644.56,3753.56) 2644.56,3710.22 ; R23.1@2887.54,3656.05 ccw(c2869.07,3677) 2897,3677 ; R23.1@2887.54,3656.05 ccw(c2869.07,3677) 2897,3677 ; R23.1@2887.54,3656.05 ccw(c2869.07,3677) 2897,3677 ; R23.1@2887.54,3656.05 ccw(c2869.07,3677) 2897,3677 ; R23.1@2887.54,3656.05 ccw(c2869.07,3677) 2897,3677 ; 2897,3677 ccw(c2924.93,3677) R23.1@2906.46,3656.05 ; 2897,3677 ccw(c2924.93,3677) R23.1@2906.46,3656.05 ; 2897,3677 ccw(c2924.93,3677) R23.1@2906.46,3656.05 ; 2897,3677 ccw(c2924.93,3677) R23.1@2906.46,3656.05 ; 2897,3677 ccw(c2924.93,3677) R23.1@2906.46,3656.05
NetR24_1: R24.1 U4.4 | length 1237.1
  Top Layer w8: U4.4@2640.83,3611.52 2640.83,3708.83 v1(2670,3738) ; U4.4@2635.86,3641.97 ccw(c2623.87,3653.96) 2640.83,3653.96 ; U4.4@2635.86,3641.97 ccw(c2623.87,3653.96) 2640.83,3653.96 ; U4.4@2635.86,3641.97 ccw(c2623.87,3653.96) 2640.83,3653.96 ; U4.4@2635.86,3641.97 ccw(c2623.87,3653.96) 2640.83,3653.96 ; U4.4@2635.86,3641.97 ccw(c2623.87,3653.96) 2640.83,3653.96 ; 2640.83,3653.96 ccw(c2657.78,3653.96) U4.4@2645.79,3641.97 ; 2640.83,3653.96 ccw(c2657.78,3653.96) U4.4@2645.79,3641.97 ; 2640.83,3653.96 ccw(c2657.78,3653.96) U4.4@2645.79,3641.97 ; 2640.83,3653.96 ccw(c2657.78,3653.96) U4.4@2645.79,3641.97 ; 2640.83,3653.96 ccw(c2657.78,3653.96) U4.4@2645.79,3641.97 ; 2653.31,3721.31 cw(c2670,3704.61) v1@2670,3728.22 ; 2653.31,3721.31 ccw(c2636.61,3738) v1@2660.22,3738 ; 2653.31,3721.31 cw(c2670,3704.61) v1@2670,3728.22 ; 2653.31,3721.31 ccw(c2636.61,3738) v1@2660.22,3738 ; 2653.31,3721.31 cw(c2670,3704.61) v1@2670,3728.22 ; 2653.31,3721.31 ccw(c2636.61,3738) v1@2660.22,3738 ; 2653.31,3721.31 ccw(c2636.61,3738) v1@2660.22,3738 ; 2653.31,3721.31 cw(c2670,3704.61) v1@2670,3728.22 ; 2653.31,3721.31 ccw(c2636.61,3738) v1@2660.22,3738 ; 2653.31,3721.31 cw(c2670,3704.61) v1@2670,3728.22
  Bottom Layer w8: v1(2670,3738) 2911,3738 2969,3680 2967,3678 ; R24.1@2967,3646.31 2967,3678 ; v1@2676.92,3731.08 cw(c2693.61,3714.39) 2693.61,3738 ; v1@2676.92,3731.08 cw(c2693.61,3714.39) 2693.61,3738 ; v1@2676.92,3731.08 cw(c2693.61,3714.39) 2693.61,3738 ; v1@2676.92,3731.08 cw(c2693.61,3714.39) 2693.61,3738 ; v1@2676.92,3731.08 cw(c2693.61,3714.39) 2693.61,3738 ; v1@2676.92,3744.92 ccw(c2693.61,3761.61) 2693.61,3738 ; v1@2676.92,3744.92 ccw(c2693.61,3761.61) 2693.61,3738 ; v1@2676.92,3744.92 ccw(c2693.61,3761.61) 2693.61,3738 ; v1@2676.92,3744.92 ccw(c2693.61,3761.61) 2693.61,3738 ; v1@2676.92,3744.92 ccw(c2693.61,3761.61) 2693.61,3738 ; R24.1@2957.54,3657.05 ccw(c2939.07,3678) 2967,3678 ; R24.1@2957.54,3657.05 ccw(c2939.07,3678) 2967,3678 ; R24.1@2957.54,3657.05 ccw(c2939.07,3678) 2967,3678 ; R24.1@2957.54,3657.05 ccw(c2939.07,3678) 2967,3678 ; R24.1@2957.54,3657.05 ccw(c2939.07,3678) 2967,3678 ; 2967,3678 ccw(c2994.93,3678) R24.1@2976.46,3657.05 ; 2967,3678 ccw(c2994.93,3678) R24.1@2976.46,3657.05 ; 2967,3678 ccw(c2994.93,3678) R24.1@2976.46,3657.05 ; 2967,3678 ccw(c2994.93,3678) R24.1@2976.46,3657.05 ; 2967,3678 ccw(c2994.93,3678) R24.1@2976.46,3657.05
NetR25_1: R25.1 U6.1 | length 490.6
  Top Layer w10: R25.1@3123,3455.31 3123,3495 3137,3509 3137,3573.23 U6.1@3136.72,3573.52 ; R25.1@3113.59,3464.72 ccw(c3090.87,3487.44) 3123,3487.44 ; R25.1@3113.59,3464.72 ccw(c3090.87,3487.44) 3123,3487.44 ; R25.1@3113.59,3464.72 ccw(c3090.87,3487.44) 3123,3487.44 ; R25.1@3113.59,3464.72 ccw(c3090.87,3487.44) 3123,3487.44 ; R25.1@3113.59,3464.72 ccw(c3090.87,3487.44) 3123,3487.44 ; 3123,3487.44 ccw(c3155.13,3487.44) R25.1@3132.41,3464.72 ; 3123,3487.44 ccw(c3155.13,3487.44) R25.1@3132.41,3464.72 ; 3123,3487.44 ccw(c3155.13,3487.44) R25.1@3132.41,3464.72 ; 3123,3487.44 ccw(c3155.13,3487.44) R25.1@3132.41,3464.72 ; 3123,3487.44 ccw(c3155.13,3487.44) R25.1@3132.41,3464.72 ; U6.1@3132.46,3543.76 cw(c3121.49,3532.8) 3137,3532.8 ; U6.1@3132.46,3543.76 cw(c3121.49,3532.8) 3137,3532.8 ; U6.1@3132.46,3543.76 cw(c3121.49,3532.8) 3137,3532.8 ; U6.1@3132.46,3543.76 cw(c3121.49,3532.8) 3137,3532.8 ; U6.1@3132.46,3543.76 cw(c3121.49,3532.8) 3137,3532.8 ; 3137,3534.17 cw(c3150.57,3534.17) U6.1@3140.98,3543.76 ; 3137,3534.17 cw(c3150.57,3534.17) U6.1@3140.98,3543.76 ; 3137,3534.17 cw(c3150.57,3534.17) U6.1@3140.98,3543.76 ; 3137,3534.17 cw(c3150.57,3534.17) U6.1@3140.98,3543.76 ; 3137,3534.17 cw(c3150.57,3534.17) U6.1@3140.98,3543.76
NetR26_1: R26.1 U6.2 | length 489.5
  Top Layer w10: U6.2@3176.09,3573.52 3176.09,3509.91 3189,3497 3189,3457.31 R26.1@3190,3456.31 ; U6.2@3171.83,3543.76 cw(c3161.54,3533.48) 3176.09,3533.48 ; U6.2@3171.83,3543.76 cw(c3161.54,3533.48) 3176.09,3533.48 ; U6.2@3171.83,3543.76 cw(c3161.54,3533.48) 3176.09,3533.48 ; U6.2@3171.83,3543.76 cw(c3161.54,3533.48) 3176.09,3533.48 ; U6.2@3171.83,3543.76 cw(c3161.54,3533.48) 3176.09,3533.48 ; 3176.09,3533.48 cw(c3190.63,3533.48) U6.2@3180.35,3543.76 ; 3176.09,3533.48 cw(c3190.63,3533.48) U6.2@3180.35,3543.76 ; 3176.09,3533.48 cw(c3190.63,3533.48) U6.2@3180.35,3543.76 ; 3176.09,3533.48 cw(c3190.63,3533.48) U6.2@3180.35,3543.76 ; 3176.09,3533.48 cw(c3190.63,3533.48) U6.2@3180.35,3543.76 ; R26.1@3179.61,3465.72 ccw(c3156.93,3488.4) 3189,3488.4 ; R26.1@3179.61,3465.72 ccw(c3156.93,3488.4) 3189,3488.4 ; R26.1@3179.61,3465.72 ccw(c3156.93,3488.4) 3189,3488.4 ; R26.1@3179.61,3465.72 ccw(c3156.93,3488.4) 3189,3488.4 ; R26.1@3179.61,3465.72 ccw(c3156.93,3488.4) 3189,3488.4 ; 3189,3488.48 ccw(c3221.18,3488.48) R26.1@3198.43,3465.72 ; 3189,3488.48 ccw(c3221.18,3488.48) R26.1@3198.43,3465.72 ; 3189,3488.48 ccw(c3221.18,3488.48) R26.1@3198.43,3465.72 ; 3189,3488.48 ccw(c3221.18,3488.48) R26.1@3198.43,3465.72 ; 3189,3488.48 ccw(c3221.18,3488.48) R26.1@3198.43,3465.72
NetR27_1: R27.1 U6.3 | length 497
  Top Layer w10: U6.3@3215.46,3573.52 3215.46,3525.54 3250,3491 R27.1@3250,3457.31 ; U6.3@3211.2,3543.76 cw(c3200.91,3533.48) 3215.46,3533.48 ; U6.3@3211.2,3543.76 cw(c3200.91,3533.48) 3215.46,3533.48 ; U6.3@3211.2,3543.76 cw(c3200.91,3533.48) 3215.46,3533.48 ; U6.3@3211.2,3543.76 cw(c3200.91,3533.48) 3215.46,3533.48 ; U6.3@3211.2,3543.76 cw(c3200.91,3533.48) 3215.46,3533.48 ; 3215.46,3533.48 cw(c3230,3533.48) U6.3@3219.72,3543.76 ; 3215.46,3533.48 cw(c3230,3533.48) U6.3@3219.72,3543.76 ; 3215.46,3533.48 cw(c3230,3533.48) U6.3@3219.72,3543.76 ; 3215.46,3533.48 cw(c3230,3533.48) U6.3@3219.72,3543.76 ; 3215.46,3533.48 cw(c3230,3533.48) U6.3@3219.72,3543.76 ; R27.1@3240.59,3466.72 ccw(c3217.87,3489.44) 3250,3489.44 ; R27.1@3240.59,3466.72 ccw(c3217.87,3489.44) 3250,3489.44 ; R27.1@3240.59,3466.72 ccw(c3217.87,3489.44) 3250,3489.44 ; R27.1@3240.59,3466.72 ccw(c3217.87,3489.44) 3250,3489.44 ; R27.1@3240.59,3466.72 ccw(c3217.87,3489.44) 3250,3489.44 ; 3250,3489.44 ccw(c3282.13,3489.44) R27.1@3259.41,3466.72 ; 3250,3489.44 ccw(c3282.13,3489.44) R27.1@3259.41,3466.72 ; 3250,3489.44 ccw(c3282.13,3489.44) R27.1@3259.41,3466.72 ; 3250,3489.44 ccw(c3282.13,3489.44) R27.1@3259.41,3466.72 ; 3250,3489.44 ccw(c3282.13,3489.44) R27.1@3259.41,3466.72
NetR28_1: R28.1 U6.4 | length 600.7
  Top Layer w8: R28.1@3305.9,3458.06 R28.1@3305.9,3462.1
  Top Layer w10: U6.4@3254.83,3573.52 3254.83,3527.17 3316,3466 R28.1@3316,3457.31 ; U6.4@3250.57,3543.76 cw(c3240.28,3533.48) 3254.83,3533.48 ; U6.4@3250.57,3543.76 cw(c3240.28,3533.48) 3254.83,3533.48 ; U6.4@3250.57,3543.76 cw(c3240.28,3533.48) 3254.83,3533.48 ; U6.4@3250.57,3543.76 cw(c3240.28,3533.48) 3254.83,3533.48 ; U6.4@3250.57,3543.76 cw(c3240.28,3533.48) 3254.83,3533.48 ; 3254.83,3533.48 cw(c3269.37,3533.48) U6.4@3259.09,3543.76 ; 3254.83,3533.48 cw(c3269.37,3533.48) U6.4@3259.09,3543.76 ; 3254.83,3533.48 cw(c3269.37,3533.48) U6.4@3259.09,3543.76 ; 3254.83,3533.48 cw(c3269.37,3533.48) U6.4@3259.09,3543.76 ; 3254.83,3533.48 cw(c3269.37,3533.48) U6.4@3259.09,3543.76 ; 3285.46,3496.54 cw(c3246.24,3457.31) R28.1@3301.71,3457.31 ; 3285.46,3496.54 cw(c3246.24,3457.31) R28.1@3301.71,3457.31 ; 3285.46,3496.54 cw(c3246.24,3457.31) R28.1@3301.71,3457.31 ; 3285.46,3496.54 cw(c3246.24,3457.31) R28.1@3301.71,3457.31 ; 3285.46,3496.54 cw(c3246.24,3457.31) R28.1@3301.71,3457.31 ; 3302.53,3479.47 cw(c3280.38,3457.31) R28.1@3311.71,3457.31 ; 3302.53,3479.47 cw(c3280.38,3457.31) R28.1@3311.71,3457.31 ; 3302.53,3479.47 cw(c3280.38,3457.31) R28.1@3311.71,3457.31 ; 3302.53,3479.47 cw(c3280.38,3457.31) R28.1@3311.71,3457.31 ; 3302.53,3479.47 cw(c3280.38,3457.31) R28.1@3311.71,3457.31
NTC_CON: R9.2 U3.31 | length 1627.7
  Top Layer w8: v1(2411,3351) 2438,3351 2489,3300 2702,3300 2747.22,3254.78 U3.31@2759.75,3254.78 ; v1@2417.92,3344.08 cw(c2434.61,3327.39) 2434.61,3351 ; v1@2417.92,3344.08 cw(c2434.61,3327.39) 2434.61,3351 ; v1@2417.92,3344.08 cw(c2434.61,3327.39) 2434.61,3351 ; v1@2417.92,3344.08 cw(c2434.61,3327.39) 2434.61,3351 ; v1@2417.92,3344.08 cw(c2434.61,3327.39) 2434.61,3351 ; v1@2417.92,3357.92 ccw(c2434.61,3374.61) 2434.61,3351 ; v1@2417.92,3357.92 ccw(c2434.61,3374.61) 2434.61,3351 ; v1@2417.92,3357.92 ccw(c2434.61,3374.61) 2434.61,3351 ; v1@2417.92,3357.92 ccw(c2434.61,3374.61) 2434.61,3351 ; v1@2417.92,3357.92 ccw(c2434.61,3374.61) 2434.61,3351
  Bottom Layer w8: R9.2@2350.32,3835 2363,3835 2377,3821 2377,3794 2420,3751 ; 2409,3762 2420,3751 ; v1(2411,3351) 2403,3359 2403,3402 2449,3448 2480.04,3448 2531.37,3499.33 2531.37,3588.86 2451,3669.23 2451,3720 2420,3751 ; R9.2@2352.46,3828.08 cw(c2359.75,3807.89) 2374.93,3823.07 ; R9.2@2352.46,3828.08 cw(c2359.75,3807.89) 2374.93,3823.07 ; R9.2@2352.46,3828.08 cw(c2359.75,3807.89) 2374.93,3823.07 ; 2403,3374.61 ccw(c2434.61,3374.61) v1@2412.26,3352.26 ; 2403,3374.61 ccw(c2434.61,3374.61) v1@2412.26,3352.26 ; 2403,3374.61 ccw(c2434.61,3374.61) v1@2412.26,3352.26 ; 2403,3374.61 ccw(c2434.61,3374.61) v1@2412.26,3352.26 ; 2403,3374.61 ccw(c2434.61,3374.61) v1@2412.26,3352.26 ; 2403,3393.92 ccw(c2453.92,3393.92) v1@2417.92,3357.92 ; 2403,3393.92 ccw(c2453.92,3393.92) v1@2417.92,3357.92 ; 2403,3393.92 ccw(c2453.92,3393.92) v1@2417.92,3357.92 ; 2403,3393.92 ccw(c2453.92,3393.92) v1@2417.92,3357.92 ; 2403,3393.92 ccw(c2453.92,3393.92) v1@2417.92,3357.92
RX_DEBUG: P2.3 RX_D.1 U3.38 | length 1202.8
  Top Layer w8: P2.3@2523.48,3032 2523.48,3044.48 2579,3100 2668,3100 2712.54,3144.54 U3.38@2759.75,3144.54 ; P2.3@2523.48,3055.56 ccw(c2523.48,3082.31) 2542.39,3063.39 ; P2.3@2523.48,3055.56 ccw(c2523.48,3082.31) 2542.39,3063.39 ; P2.3@2523.48,3055.56 ccw(c2523.48,3082.31) 2542.39,3063.39 ; P2.3@2523.48,3055.56 ccw(c2523.48,3082.31) 2542.39,3063.39 ; P2.3@2523.48,3055.56 ccw(c2523.48,3082.31) 2542.39,3063.39 ; P2.3@2531.17,3039.87 cw(c2560.84,3039.87) 2539.86,3060.86 ; P2.3@2531.17,3039.87 cw(c2560.84,3039.87) 2539.86,3060.86 ; P2.3@2531.17,3039.87 cw(c2560.84,3039.87) 2539.86,3060.86 ; P2.3@2531.17,3039.87 cw(c2560.84,3039.87) 2539.86,3060.86 ; P2.3@2531.17,3039.87 cw(c2560.84,3039.87) 2539.86,3060.86 ; P2.3@2539.17,3039.87 cw(c2588.15,3039.87) 2553.51,3074.51 ; P2.3@2539.17,3039.87 cw(c2588.15,3039.87) 2553.51,3074.51 ; P2.3@2539.17,3039.87 cw(c2588.15,3039.87) 2553.51,3074.51 ; P2.3@2539.17,3039.87 cw(c2588.15,3039.87) 2553.51,3074.51 ; P2.3@2539.17,3039.87 cw(c2588.15,3039.87) 2553.51,3074.51 ; P2.3@2524,3051.78 ccw(c2524,3068.15) 2535.57,3056.57 cw(c2524,3068.15) P2.3@2524,3051.78 ; P2.3@2533.78,3042 cw(c2564.63,3042) 2542.82,3063.82 ccw(c2564.63,3042) P2.3@2533.78,3042
  Bottom Layer w8: RX_D.1@2523,2981 2524,2982 v1(2524,3042) ; RX_D.1@2524,3018.39 cw(c2547.61,3018.39) 2530.92,3035.08 ccw(c2547.61,3018.39) RX_D.1@2524,3018.39 ; RX_D.1@2524,3018.39 ccw(c2500.39,3018.39) 2517.08,3035.08 cw(c2500.39,3018.39) RX_D.1@2524,3018.39 ; v1(2524,3042) cw(c2481.86,3042) 2505.42,3007.06 ccw(c2481.86,3042) v1(2524,3042) ; v1(2524,3042) ccw(c2568.91,3042) 2541.9,3006.11 cw(c2568.91,3042) v1(2524,3042) ; RX_D.1@2509.9,3000.43 ccw(c2492.01,3026.95) 2524,3026.95 cw(c2492.01,3026.95) RX_D.1@2509.9,3000.43 ; 2524,3025.96 ccw(c2556.84,3025.96) 2537.09,2999.72 cw(c2556.84,3025.96) 2524,3025.96
RX_LEIDA: LeiDa.4 R31.1 RX_L.1 U3.2 | length 3468.6
  Top Layer w8: v1(2776,2960.63) 2776,3010 2803.03,3037.03 U3.2@2803.03,3085.51 ; v1@3395,3828 3448.16,3881.16 LeiDa.4@3448.16,3925.98 LeiDa.4@3448.16,3929.98 ; v1@2769.08,2967.55 ccw(c2752.39,2984.24) 2776,2984.24 ; v1@2769.08,2967.55 ccw(c2752.39,2984.24) 2776,2984.24 ; v1@2769.08,2967.55 ccw(c2752.39,2984.24) 2776,2984.24 ; v1@2769.08,2967.55 ccw(c2752.39,2984.24) 2776,2984.24 ; 2776,2984.24 ccw(c2799.61,2984.24) v1@2782.92,2967.55 ; 2776,2984.24 ccw(c2799.61,2984.24) v1@2782.92,2967.55 ; 2776,2984.24 ccw(c2799.61,2984.24) v1@2782.92,2967.55 ; 2776,2984.24 ccw(c2799.61,2984.24) v1@2782.92,2967.55 ; v1@3394,3837.78 ccw(c3394,3863.8) 3412.4,3845.4 ; v1@3394,3837.78 ccw(c3394,3863.8) 3412.4,3845.4 ; v1@3394,3837.78 ccw(c3394,3863.8) 3412.4,3845.4 ; v1@3403.78,3828 cw(c3424.98,3828) 3409.99,3842.99 ; v1@3403.78,3828 cw(c3424.98,3828) 3409.99,3842.99 ; v1@3403.78,3828 cw(c3424.98,3828) 3409.99,3842.99 ; LeiDa.4@3442.64,3904.77 cw(c3429.31,3891.44) 3448.16,3891.44 ; LeiDa.4@3442.64,3904.77 cw(c3429.31,3891.44) 3448.16,3891.44 ; LeiDa.4@3442.64,3904.77 cw(c3429.31,3891.44) 3448.16,3891.44 ; 3448.16,3887.44 cw(c3467.02,3887.44) 3453.69,3900.77 ccw(c3467.02,3887.44) 3448.16,3887.44 ; 3448.16,3887.44 ccw(c3429.31,3887.44) 3442.64,3900.77 cw(c3429.31,3887.44) 3448.16,3887.44 ; 3448.16,3891.44 cw(c3467.02,3891.44) LeiDa.4@3453.69,3904.77 ; 3448.16,3891.44 cw(c3467.02,3891.44) LeiDa.4@3453.69,3904.77 ; 3448.16,3891.44 cw(c3467.02,3891.44) LeiDa.4@3453.69,3904.77
  Bottom Layer w8: v1@2780.63,2956 2819.16,2956 2834.16,2941 2943.53,2941 2952.53,2932 3263,2932 3422,3091 3422,3092.92 3488.08,3159 3613.46,3159 3791.78,3337.32 3791.78,3506.96 3761.74,3537 3689.71,3537 3460.22,3766.49 3460.22,3842 ; R31.1@3243,3650.31 3243,3695 3251,3703 3253,3703 3269,3703 v1(3394,3828) 3418.78,3852.78 3449.44,3852.78 3460.22,3842 ; RX_L.1@3545,3803 3506,3842 3460.22,3842 ; R31.1@3232.88,3660.43 ccw(c3208.46,3684.85) 3243,3684.85 ; R31.1@3232.88,3660.43 ccw(c3208.46,3684.85) 3243,3684.85 ; R31.1@3232.88,3660.43 ccw(c3208.46,3684.85) 3243,3684.85 ; R31.1@3232.88,3660.43 ccw(c3208.46,3684.85) 3243,3684.85 ; R31.1@3232.88,3660.43 ccw(c3208.46,3684.85) 3243,3684.85 ; 3243,3684.85 ccw(c3277.54,3684.85) R31.1@3253.12,3660.43 ; 3243,3684.85 ccw(c3277.54,3684.85) R31.1@3253.12,3660.43 ; 3243,3684.85 ccw(c3277.54,3684.85) R31.1@3253.12,3660.43 ; 3243,3684.85 ccw(c3277.54,3684.85) R31.1@3253.12,3660.43 ; 3243,3684.85 ccw(c3277.54,3684.85) R31.1@3253.12,3660.43 ; 3377.31,3811.31 cw(c3394,3794.61) v1@3394,3818.22 ; 3377.31,3811.31 ccw(c3360.61,3828) v1@3384.22,3828 ; 3377.31,3811.31 cw(c3394,3794.61) v1@3394,3818.22 ; 3377.31,3811.31 ccw(c3360.61,3828) v1@3384.22,3828 ; 3377.31,3811.31 ccw(c3360.61,3828) v1@3384.22,3828 ; 3377.31,3811.31 cw(c3394,3794.61) v1@3394,3818.22 ; v1@3394,3837.78 ccw(c3394,3861.39) 3410.69,3844.69 ; v1@3394,3837.78 ccw(c3394,3861.39) 3410.69,3844.69 ; v1@3394,3837.78 ccw(c3394,3861.39) 3410.69,3844.69 ; v1@3403.78,3828 cw(c3427.39,3828) 3410.69,3844.69 ; v1@3403.78,3828 cw(c3427.39,3828) 3410.69,3844.69 ; v1@3403.78,3828 cw(c3427.39,3828) 3410.69,3844.69
SET_CHARG_I: Q7.1 U3.40 | length 1627.7
  Top Layer w8: v1(2700,3004) 2700,3080 2733.04,3113.04 U3.40@2759.75,3113.04 ; Q7.1@3411.69,2961.92 3457.08,2961.92 v1(3458,2961) ; v1@2693.08,3010.92 ccw(c2676.39,3027.61) 2700,3027.61 ; v1@2693.08,3010.92 ccw(c2676.39,3027.61) 2700,3027.61 ; v1@2693.08,3010.92 ccw(c2676.39,3027.61) 2700,3027.61 ; 2700,3027.61 ccw(c2723.61,3027.61) v1@2706.92,3010.92 ; 2700,3027.61 ccw(c2723.61,3027.61) v1@2706.92,3010.92 ; 2700,3027.61 ccw(c2723.61,3027.61) v1@2706.92,3010.92 ; Q7.1@3426.47,2956.4 cw(c3439.8,2943.06) 3439.8,2961.92 ; Q7.1@3426.47,2956.4 cw(c3439.8,2943.06) 3439.8,2961.92 ; Q7.1@3426.47,2956.4 cw(c3439.8,2943.06) 3439.8,2961.92 ; Q7.1@3426.47,2967.45 ccw(c3439.8,2980.78) 3439.8,2961.92 ; Q7.1@3426.47,2967.45 ccw(c3439.8,2980.78) 3439.8,2961.92 ; Q7.1@3426.47,2967.45 ccw(c3439.8,2980.78) 3439.8,2961.92 ; Q7.1@3432.16,2961.92 cw(c3432.16,2935.16) v1@3451.08,2954.08 ; Q7.1@3432.16,2961.92 cw(c3432.16,2935.16) v1@3451.08,2954.08 ; Q7.1@3432.16,2961.92 cw(c3432.16,2935.16) v1@3451.08,2954.08 ; 3436.62,2961.92 ccw(c3436.62,2982.38) v1@3451.08,2967.92 ; 3436.62,2961.92 ccw(c3436.62,2982.38) v1@3451.08,2967.92 ; 3436.62,2961.92 ccw(c3436.62,2982.38) v1@3451.08,2967.92
  Bottom Layer w10: v1(2700,3004) 2700,2937 2803.15,2833.85 2883.46,2833.85 2893.24,2843.63 3340.63,2843.63 v1(3458,2961) ; v1@2693.79,2997.79 cw(c2678.8,2982.8) 2700,2982.8 ; v1@2693.79,2997.79 cw(c2678.8,2982.8) 2700,2982.8 ; v1@2693.79,2997.79 cw(c2678.8,2982.8) 2700,2982.8 ; 2700,2982.8 cw(c2721.2,2982.8) v1@2706.21,2997.79 ; 2700,2982.8 cw(c2721.2,2982.8) v1@2706.21,2997.79 ; 2700,2982.8 cw(c2721.2,2982.8) v1@2706.21,2997.79 ; 3443.01,2946.01 cw(c3458,2931.02) v1@3458,2952.22 ; 3443.01,2946.01 ccw(c3428.02,2961) v1@3449.22,2961 ; 3443.01,2946.01 cw(c3458,2931.02) v1@3458,2952.22 ; 3443.01,2946.01 ccw(c3428.02,2961) v1@3449.22,2961 ; 3443.01,2946.01 ccw(c3428.02,2961) v1@3449.22,2961 ; 3443.01,2946.01 cw(c3458,2931.02) v1@3458,2952.22
SWS: P1.3 U3.7 | length 1866.3
  Top Layer w8: P1.3@2365,2782 2368,2785 2620,2785 2629,2794 2788,2794 2807,2813 2873.63,2813 2916.39,2855.77 2916.39,2993.39 2881.77,3028.02 U3.7@2881.77,3085.51 ; P1.3@2373.13,2773.87 cw(c2400,2747) 2400,2785 ; P1.3@2373.13,2773.87 cw(c2400,2747) 2400,2785 ; P1.3@2373.13,2773.87 cw(c2400,2747) 2400,2785 ; P1.3@2373.13,2773.87 cw(c2400,2747) 2400,2785 ; P1.3@2373.13,2773.87 cw(c2400,2747) 2400,2785 ; P1.3@2378.79,2768.21 cw(c2419.31,2727.69) 2419.31,2785 ; P1.3@2378.79,2768.21 cw(c2419.31,2727.69) 2419.31,2785 ; P1.3@2378.79,2768.21 cw(c2419.31,2727.69) 2419.31,2785 ; P1.3@2378.79,2768.21 cw(c2419.31,2727.69) 2419.31,2785 ; P1.3@2378.79,2768.21 cw(c2419.31,2727.69) 2419.31,2785 ; P1.3@2378.79,2795.79 ccw(c2404.82,2821.82) 2404.82,2785 ; P1.3@2378.79,2795.79 ccw(c2404.82,2821.82) 2404.82,2785 ; P1.3@2378.79,2795.79 ccw(c2404.82,2821.82) 2404.82,2785 ; P1.3@2378.79,2795.79 ccw(c2404.82,2821.82) 2404.82,2785 ; P1.3@2378.79,2795.79 ccw(c2404.82,2821.82) 2404.82,2785 ; P1.3@2384.44,2762.56 cw(c2438.62,2708.38) 2438.62,2785 ; P1.3@2384.44,2762.56 cw(c2438.62,2708.38) 2438.62,2785 ; P1.3@2384.44,2762.56 cw(c2438.62,2708.38) 2438.62,2785 ; P1.3@2384.44,2762.56 cw(c2438.62,2708.38) 2438.62,2785 ; P1.3@2384.44,2762.56 cw(c2438.62,2708.38) 2438.62,2785 ; P1.3@2384.44,2801.44 ccw(c2424.14,2841.14) 2424.14,2785 ; P1.3@2384.44,2801.44 ccw(c2424.14,2841.14) 2424.14,2785 ; P1.3@2384.44,2801.44 ccw(c2424.14,2841.14) 2424.14,2785 ; P1.3@2384.44,2801.44 ccw(c2424.14,2841.14) 2424.14,2785 ; P1.3@2384.44,2801.44 ccw(c2424.14,2841.14) 2424.14,2785
TX_DEBUG: P2.4 TX_D.1 U3.39 | length 390.5
  Top Layer w8: v1(2602.22,3032) 2626,3032 ; U3.39@2759.75,3128.79 2722.79,3128.79 2626,3032 ; P2.4@2616.64,3025.83 cw(c2626,3021.82) 2626,3032 ; P2.4@2616.64,3025.83 cw(c2626,3021.82) 2626,3032 ; P2.4@2616.64,3025.83 cw(c2626,3021.82) 2626,3032 ; P2.4@2616.64,3025.83 cw(c2626,3021.82) 2626,3032 ; P2.4@2616.64,3025.83 cw(c2626,3021.82) 2626,3032 ; P2.4@2616.64,3038.17 ccw(c2626,3042.18) 2626,3032 ; P2.4@2616.64,3038.17 ccw(c2626,3042.18) 2626,3032 ; P2.4@2616.64,3038.17 ccw(c2626,3042.18) 2626,3032 ; P2.4@2616.64,3038.17 ccw(c2626,3042.18) 2626,3032 ; P2.4@2616.64,3038.17 ccw(c2626,3042.18) 2626,3032 ; 2625.83,3032 cw(c2625.83,3055.61) 2609.14,3038.92 ccw(c2625.83,3055.61) 2625.83,3032 ; 2625.83,3032 ccw(c2625.83,3008.39) 2609.14,3025.08 cw(c2625.83,3008.39) 2625.83,3032